# Altium PCB rlink 0603.pcbdoc
Units mil, origin at the board's own origin, x right, y up, seen from the top; angles counter-clockwise.
Board outline not stored, 2 copper layers (Top Layer, Bottom Layer); 20 components, 0 nets, 91 pads, 39 vias.
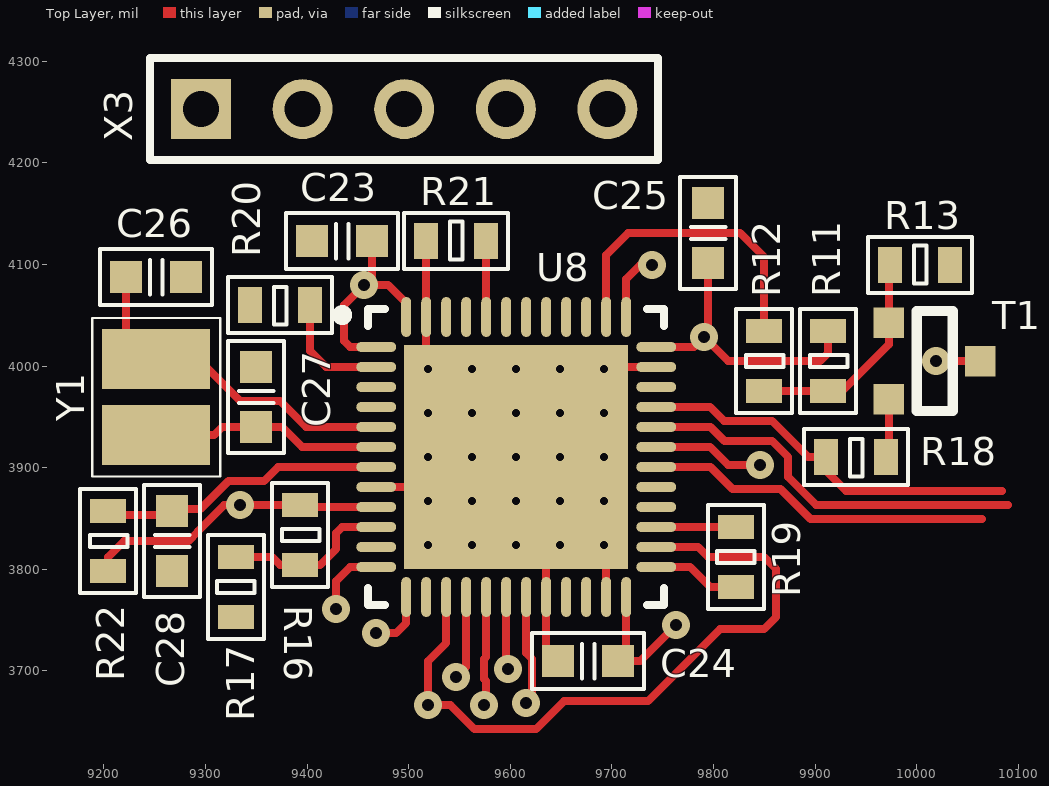
[diagram p0: Top Layer view]
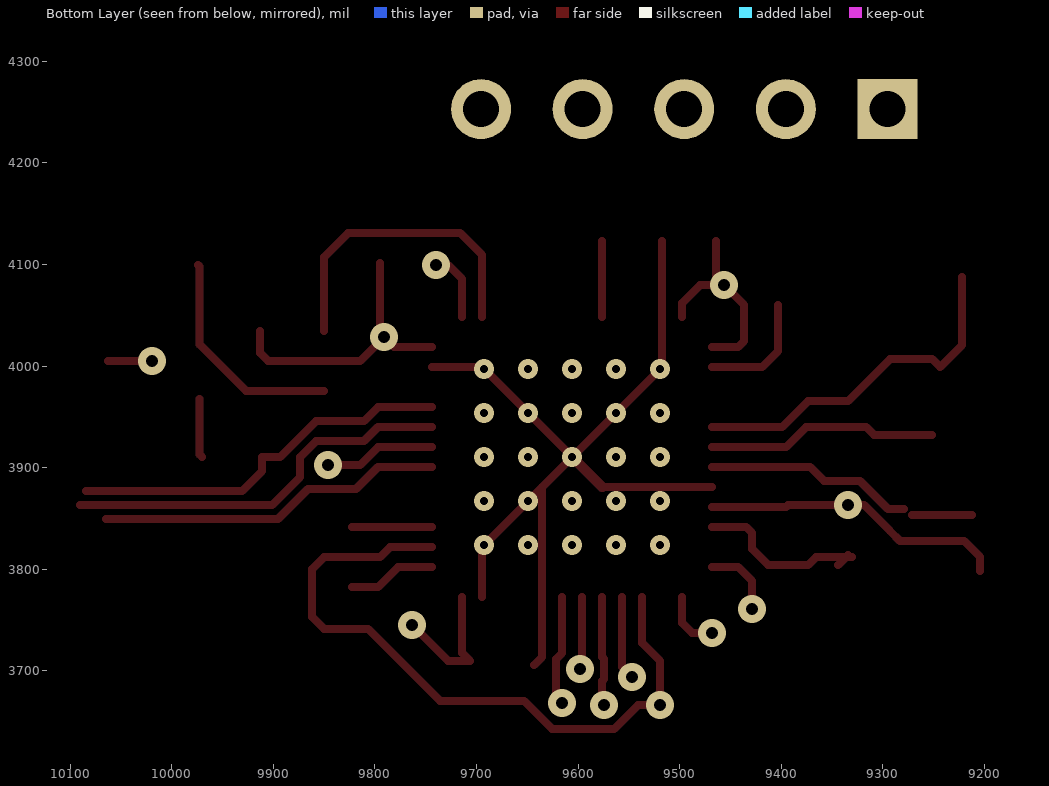
[diagram p1: Bottom Layer view, seen from below]

## Layer stack, top to bottom
Top Solder: solder mask 0.4, Solder Resist, Dk 3.5
Top Layer: signal copper 1.4
Dielectric 1: dielectric 12.6, FR-4, Dk 4.8
Bottom Layer: signal copper 1.4
Bottom Solder: solder mask 0.4, Solder Resist, Dk 3.5

## Components (designator, comment, footprint, x,y, rotation, side; value= is the part's Value field where it differs from the comment)
C23 "100nF 16V" C_0603 9434.61,4123.11 r0 top
C24 "100nF 16V" C_0603 9676.73,3709.72 r0 top
C25 "100nF 16V" C_0603 9794.84,4130.98 r270 top
C26 "10pF 16V" C_0603 9251.53,4087.68 r180 top
C27 "10pF 16V" C_0603 9349.96,3969.57 r270 top
C28 "100nF 16V" C_0603 9267.28,3827.83 r90 top
R11 "10K" R_0603 9912.95,4005 r90 top
R12 "100" R_0603 9849.96,4005 r90 top
R13 "36K" R_0603 10003.5,4099.49 r180 top
R16 "4.7K" R_0603 9393.27,3833.74 r90 top
R17 "4.7K" R_0603 9330.27,3782.56 r270 top
R18 "1.5K" R_0603 9940.51,3910.51 r0 top
R19 "100" R_0603 9822.4,3812.09 r270 top
R20 "4.7K" R_0603 9373.58,4060.12 r0 top
R21 "100K" R_0603 9546.81,4123.11 r180 top
R22 "100K" R_0603 9204.29,3827.83 r90 top
T1 "MMBT9013" SOT23 9972.56,4042.5 r0 top
U8 "STM32F103CBU6" STM-UFQFPN48_M 9605.87,3910.51 r0 top
X3 "PLS-5" PLS-5-3D 9295.63,4253.03 r0 top
Y1 "NX3225GD-8.000M" NX3225GD 9251.53,3969.57 r0 top

## Footprints (in the part's own frame and the unit in brackets; to place one, negate y for a bottom-side part, rotate by r counter-clockwise, add the part's x,y. Pads: shape width x height; smd on the part's side, far side on the other; paste and mask are expansions set on the pad)
C_0603 [mm] "Chip Capacitor; Body 1.6 x 0.8 mm (LxW typ)"
  rect 0.8x0.8 smd: 1(-0.75,0) 2(0.75,0)
  silkscreen extent -1.4,-0.7 1.4,0.7, body extent -0.8,-0.4 0.8,0.4, height 0.3
NX3225GD [mm]
  rect 2.7x1.5 smd: 1(0,-0.95) 2(0,0.95)
  silkscreen extent -1.6,-1.98 1.6,1.98, body extent -1.25,-1.6 1.25,1.6, height 1
PLS-5-3D [mm] "Connector; Header; 5 Position"
  rect 1.5x1.5 hole 0.9: 1(0,0)
  round 1.5 hole 0.9: 2(2.54,0) 3(5.08,0) 4(7.62,0) 5(10.16,0)
  silkscreen extent -1.27,-1.27 11.43,1.27, body extent -1.27,-1.27 11.43,1.27, height 8.44
R_0603 [mm]
  rect 0.6x0.9 smd: 1(-0.75,0) 2(0.75,0)
  silkscreen extent -1.3,-0.7 1.3,0.7, body extent -0.8,-0.41 0.8,0.41, height 0.45
SOT23 [mil]
  rect 30x30 smd: 1(0,0) 2(0,-75) 3(90,-37.5)
  silkscreen extent 28,-87 63,12, body extent -4,-97 94,21, height 41
STM-UFQFPN48_M [mm] "QFN, 48-Leads, Body 7.1x7.1mm, Pitch 0.5mm, Thermal Pad 5.6x5.6mm, IPC Low Density"
  oval 1x0.25 smd mask+0.07: 1(-3.5,2.75) 2(-3.5,2.25) 3(-3.5,1.75) 4(-3.5,1.25) 5(-3.5,0.75) 6(-3.5,0.25) 7(-3.5,-0.25) 8(-3.5,-0.75) 9(-3.5,-1.25) 10(-3.5,-1.75) 11(-3.5,-2.25) 12(-3.5,-2.75) 25(3.5,-2.75) 26(3.5,-2.25) 27(3.5,-1.75) 28(3.5,-1.25) 29(3.5,-0.75) 30(3.5,-0.25) 31(3.5,0.25) 32(3.5,0.75) 33(3.5,1.25) 34(3.5,1.75) 35(3.5,2.25) 36(3.5,2.75)
  oval 0.25x1 smd mask+0.07: 13(-2.75,-3.5) 14(-2.25,-3.5) 15(-1.75,-3.5) 16(-1.25,-3.5) 17(-0.75,-3.5) 18(-0.25,-3.5) 19(0.25,-3.5) 20(0.75,-3.5) 21(1.25,-3.5) 22(1.75,-3.5) 23(2.25,-3.5) 24(2.75,-3.5) 37(2.75,3.5) 38(2.25,3.5) 39(1.75,3.5) 40(1.25,3.5) 41(0.75,3.5) 42(0.25,3.5) 43(-0.25,3.5) 44(-0.75,3.5) 45(-1.25,3.5) 46(-1.75,3.5) 47(-2.25,3.5) 48(-2.75,3.5)
  rect 5.6x5.6 smd mask+0.07: 49(0,0)
  silkscreen extent -4.47,-3.7 3.7,3.7, body extent -3.51,-3.52 3.51,3.5, height 0.78

## Part data
C23 C24 C25 C26 C27 C28: library part C0603, "Capacitor"
R11 R12 R13 R16 R17 R18 R19 R20 R21 R22: library part R0603, "Resistor"
T1: library part NPN, "NPN Bipolar Transistor", Code - JEDEC=TO-226-AA, Published=8-Jun-2000, Publisher="Altium Limited", Revision="July-2002: Re-released for DXP Platform."
U8: "STM32 ARM-based 32-bit MCU Performance Line with 128 kB Flash, 20 kB Internal RAM, -40 to +85°C Temperature, 48-Pin VFQFPN, Tray", ComponentLink1Description="Manufacturer URL", ComponentLink1URL=http://www.st.com/, ComponentLink2Description="STM32F103 Datasheet", ComponentLink2URL=http://www.st.com/internet/com/TECHNICAL_RESOURCES/TECHNICAL_LITERATURE/DATASHEET/CD00161566.pdf, ComponentLink3Description="STM32 Family Web Page", ComponentLink3URL=www.st.com/stm32, DatasheetVersion="rev13.0, Apr-2011", PackageDescription="48-Pin Quad Flat No-Lead, 7 x 7 x 0.9 mm Body, 0.5 mm Pitch, Exposed Pad", PackageReference=VFQFPN48, PackageVersion=2011
X3: library part PLS2-5, "Header, 5-Pin", LatestRevisionDate=17-Jul-2002, LatestRevisionNote="Re-released for DXP Platform.", Publisher="Altium Limited"
Y1: library part NX3225GD, "Crystal Oscillator"

## Via types
v1: diameter 19.68, hole 7.87, Top Layer to Bottom Layer, 25 vias
v2: diameter 27.56, hole 11.81, Top Layer to Bottom Layer, tented both sides, 14 vias

## Nets (pads, with @x,y where several pads share a name; then routed paths per layer and width w, separated by ;. In a path a pad name is that pad's centre, name@x,y a point inside that pad or via, vN(x,y) a via of type N, cw(c..) or ccw(c..) an arc to the next point about the centre after c; other vN are vias at no path point)
pads on no net: C23.1 C23.2 C24.1 C24.2 C25.1 C25.2 C26.1 C26.2 C27.1 C27.2 C28.1 C28.2 R11.1 R11.2 R12.1 R12.2 R13.1 R13.2 R16.1 R16.2 R17.1 R17.2 R18.1 R18.2 R19.1 R19.2 R20.1 R20.2 R21.1 R21.2 R22.1 R22.2 T1.1 T1.2 T1.3 U8.1 U8.2 U8.3 U8.4 U8.5 U8.6 U8.7 U8.8 U8.9 U8.10 U8.11 U8.12 U8.13 U8.14 U8.15 U8.16 U8.17 U8.18 U8.19 U8.20 U8.21 U8.22 U8.23 U8.24 U8.25 U8.26 U8.27 U8.28 U8.29 U8.30 U8.31 U8.32 U8.33 U8.34 U8.35 U8.36 U8.37 U8.38 U8.39 U8.40 U8.41 U8.42 U8.43 U8.44 U8.45 U8.46 U8.47 U8.48 U8.49 X3.1 X3.2 X3.3 X3.4 X3.5 Y1.1 Y1.2
copper on no net: | length 6349.3
  Top Layer w7.87: 9204.29,3798.31 9204.29,3812.09 9220.04,3827.83 9283.17,3827.83 9292.87,3837.54 9292.87,3837.68 9318.46,3863.27 v2(9334.21,3863.27) 9393.27,3863.27 9395.24,3861.3 9468.07,3861.3 ; 9212.16,3853.42 9271.22,3853.42 ; 9222.01,4087.68 9222.01,4020.75 9243.66,3999.09 9251.54,4006.97 9292.87,4006.97 9334.21,3965.63 9373.58,3965.63 9399.17,3940.04 9468.07,3940.04 ; 9251.54,3932.17 9308.62,3932.17 9316.5,3940.04 9349.96,3940.04 9375.55,3940.04 9395.24,3920.35 9468.07,3920.35 ; 9279.09,3859.33 9295.04,3859.33 9322.6,3886.89 9357.83,3886.89 9371.61,3900.67 9468.07,3900.67 ; 9330.27,3812.09 9336.18,3812.09 ; 9334.21,3814.05 9336.18,3812.09 ; 9344.05,3804.21 9336.18,3812.09 ; 9403.11,4060.12 9403.11,4014.84 9418.86,3999.09 9468.07,3999.09 ; v2(9428.7,3760.91) 9428.7,3788.46 9442.48,3802.24 9468.07,3802.24 ; 9464.13,4123.11 9464.13,4087.68 v2(9456.26,4079.8) ; v2(9468.07,3737.28) 9487.76,3737.28 9497.6,3747.13 9497.6,3772.72 ; 9468.07,3841.61 9434.61,3841.61 9428.7,3835.71 9428.7,3819.96 9412.95,3804.21 9393.27,3804.21 9373.58,3804.21 9365.71,3812.09 9336.18,3812.09 ; 9468.07,3880.98 9576.34,3880.98 ; 9468.07,4018.78 9442.48,4018.78 9436.57,4024.68 9436.57,4060.12 v2(9456.26,4079.8) ; 9497.6,4048.31 9497.6,4062.09 9479.88,4079.8 v2(9456.26,4079.8) ; 9517.28,4123.11 9517.28,4048.31 9517.28,3999.09 v1(9519.25,3997.13) v1(9562.56,3953.82) v1(9605.87,3910.51) ; 9536.97,3772.72 9536.97,3727.44 9519.25,3709.72 v2(9519.25,3666.42) 9540.96,3666.42 9564.58,3642.79 9584.15,3642.79 9625.55,3642.79 9653.11,3670.35 9735.79,3670.35 9806.65,3741.22 9849.96,3741.22 9861.77,3753.03 9861.77,3800.28 9849.96,3812.09 9794.84,3812.09 9785,3821.93 9743.66,3821.93 ; v2(9546.81,3693.98) 9556.65,3703.82 9556.65,3772.72 ; v2(9574.37,3666.42) 9576.34,3668.39 9576.34,3690.1 9574.36,3692.07 9574.36,3711.64 9576.34,3713.61 9576.34,3772.72 ; 9576.34,4048.31 9576.34,4123.11 ; 9596.02,3772.72 9596.02,3703.82 v2(9597.99,3701.85) ; v2(9615.71,3668.39) 9621.61,3674.29 9621.61,3711.64 9615.71,3717.54 9615.71,3772.72 ; 9643.27,3705.79 9635.39,3713.66 9635.39,3772.72 9635.39,3880.98 ; 9694.45,3772.72 9694.45,3821.93 v1(9692.48,3823.9) v1(9649.17,3867.2) 9635.39,3880.98 ; 9694.45,4048.31 9694.45,4109.33 9716.1,4130.98 9826.34,4130.98 9849.96,4107.36 9849.96,4034.53 ; 9714.13,3772.72 9714.13,3717.6 9706.26,3709.72 9727.91,3709.72 v2(9763.35,3745.16) ; 9714.13,4048.31 9714.13,4085.71 9727.91,4099.49 v2(9739.72,4099.49) ; 9743.66,3802.24 9777.13,3802.24 9796.81,3782.56 9822.4,3782.56 ; 9743.66,3841.61 9822.4,3841.61 ; 9743.66,3900.67 9797.01,3900.67 9818.66,3879.02 9865.91,3879.02 9895.43,3849.49 10064.53,3849.49 ; 9743.66,3920.35 9796.81,3920.35 9814.53,3902.64 v2(9846.02,3902.64) ; 9743.66,3940.04 9797.01,3940.04 9810.79,3926.26 9857.83,3926.26 9873.58,3910.51 9873.58,3890.83 9901.14,3863.27 10090.12,3863.27 ; 9743.66,3959.72 9796.81,3959.72 9810.59,3945.94 9857.83,3945.94 9893.27,3910.51 9910.98,3910.51 9910.98,3896.73 9930.67,3877.05 10084.21,3877.05 ; 9743.66,3999.09 9694.45,3999.09 v1(9649.17,3953.82) v1(9605.87,3910.51) ; 9743.66,4018.78 9781.06,4018.78 v2(9790.91,4028.62) ; 9794.84,4101.46 9794.84,4032.56 v2(9790.91,4028.62) ; 9849.96,3975.47 9912.95,3975.47 9926.73,3975.47 9972.56,4021.3 9972.56,4042.5 9972.56,4098.07 9973.98,4099.49 ; 9912.95,4034.53 9912.95,4012.87 9905.08,4005 9814.53,4005 v2(9790.91,4028.62) ; 9970.04,3910.51 9972.56,3913.03 9972.56,3967.5 ; v2(10019.25,4005) 10062.56,4005 ; v1(9605.87,3910.51) 9635.39,3880.98
  Top Layer w10: 9576.34,3880.98 v1(9605.87,3910.51)
  other v1: 9519.25,3823.9 9562.56,3823.9 9605.87,3823.9 9649.17,3823.9 9519.25,3867.2 9562.56,3867.2 9605.87,3867.2 9692.48,3867.2 9519.25,3910.51 9562.56,3910.51 9649.17,3910.51 9692.48,3910.51 9519.25,3953.82 9605.87,3953.82 9692.48,3953.82 9562.56,3997.13 9605.87,3997.13 9649.17,3997.13 9692.48,3997.13